# Altium PCB TMP75.PcbDoc
Units mil, origin at the board's own origin, x right, y up, seen from the top; angles counter-clockwise.
Board outline 910.03 x 405.03 mil, 2 copper layers (Top Layer, Bottom Layer); 8 components, 5 nets, 23 pads, 0 vias.
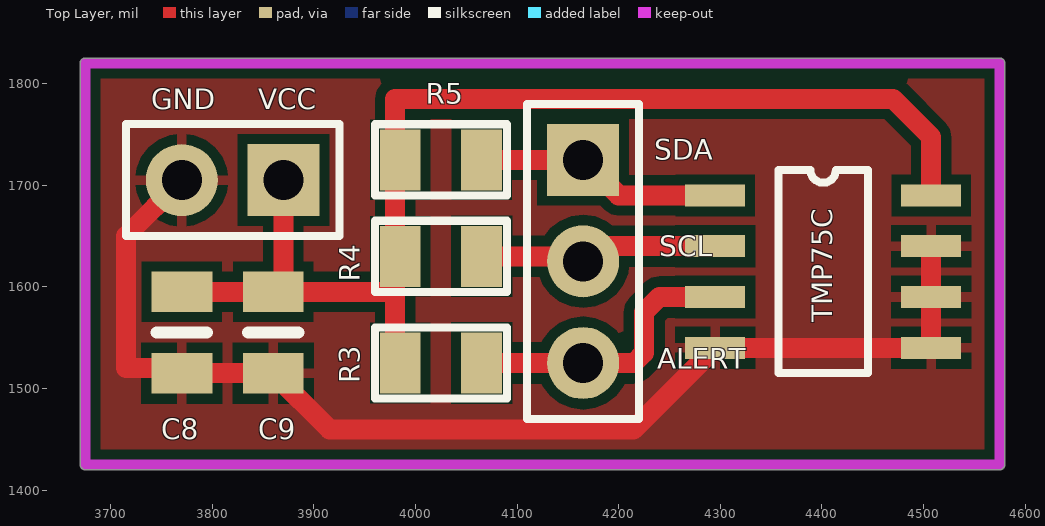
[diagram p0: Top Layer view]
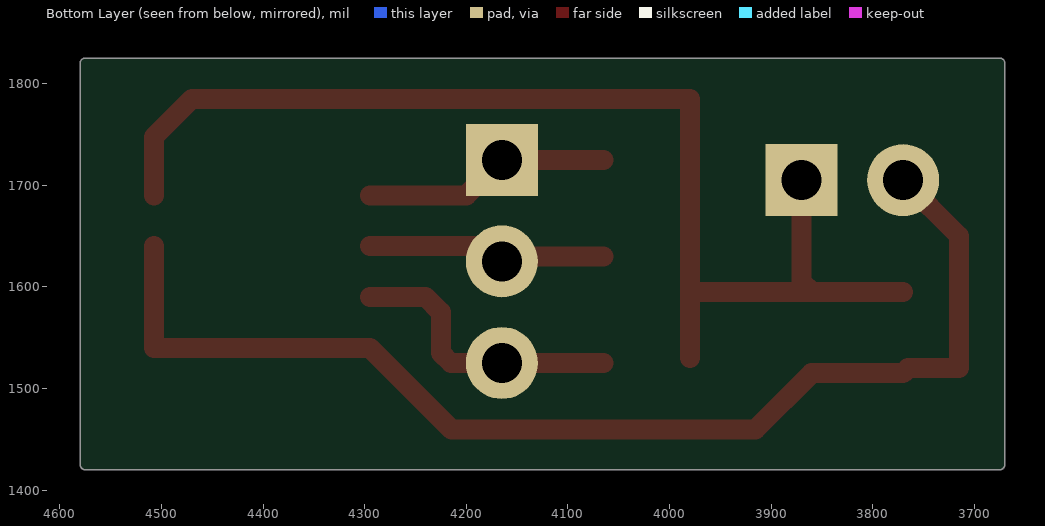
[diagram p1: Bottom Layer view, seen from below]
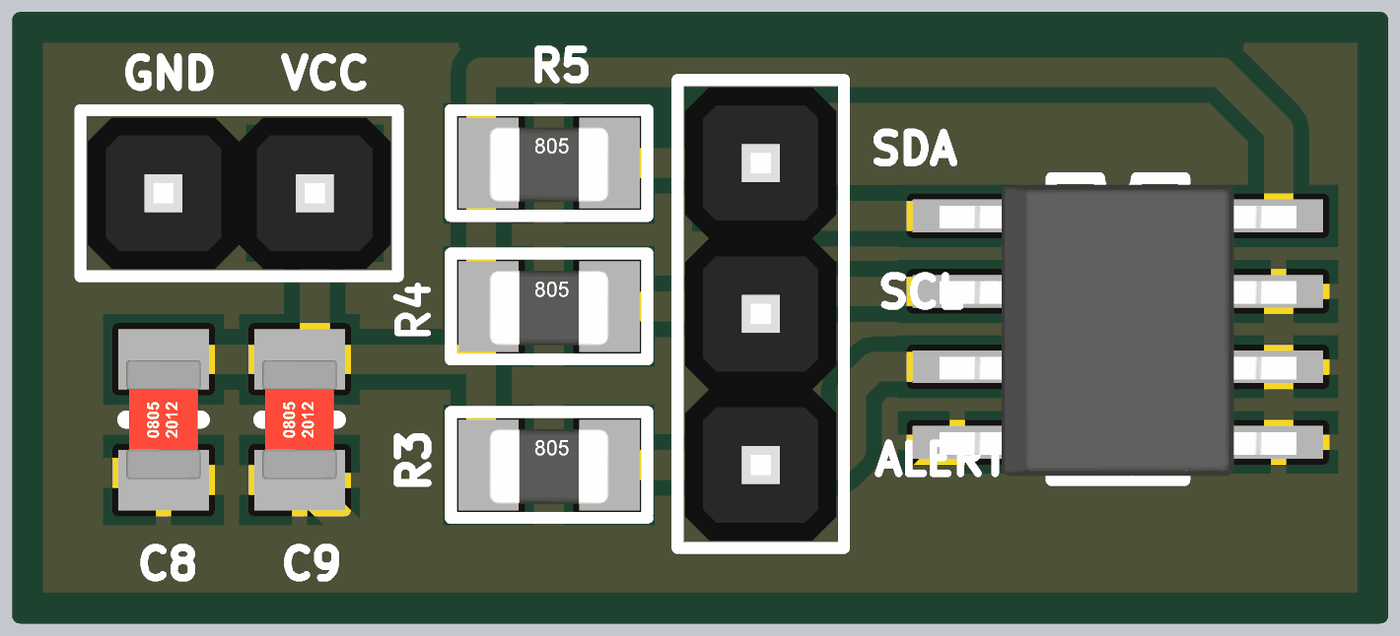
[diagram p2: 3D render of the assembled board from above, using the file's embedded part models]

## Layer stack, top to bottom
Top Solder: solder mask 0.4, Solder Resist, Dk 3.5
Top Layer: signal copper 1.4
Dielectric 1: dielectric 12.6, FR-4, Dk 4.8
Bottom Layer: signal copper 1.4
Bottom Solder: solder mask 0.4, Solder Resist, Dk 3.5

## Board outline
3669.99,1425 ccw(c3675,1425) 3675,1419.98 4575,1419.98 ccw(c4575,1425) 4580.02,1425 4580.02,1820 ccw(c4575,1820) 4575,1825.02 3675,1825.02 ccw(c3675,1820) 3669.99,1820

## Design rules (kind name [scope] priority, off if disabled: settings)
Clearance [All] p1: gap=10
PolygonConnect [All] p1: connectstyle=Relief reliefconductorwidth=10 reliefentries=4 polygonreliefangle="90 Angle" airgapwidth=10
RoutingVias [All] p1: holewidth=28 width=50 viastyle="Through Hole" minholewidth=28 minwidth=50 maxholewidth=28 maxwidth=50
SolderMaskExpansion [All] p1: expansion=4
Width [All] p1: maxlimit=19.68 minlimit=19.68 preferedwidth=19.68 minimp=50.000000 maximp=50.000000 favimp=50.000000
30 further rules are at their usual default settings.

## Classes and differential pairs
component class Sheet2: *

## Components (designator, comment, footprint, x,y, rotation, side; value= is the part's Value field where it differs from the comment)
C8 "10uF" SMD-0805C 3770,1555 r0 top
C9 "0.1uF" SMD-0805C 3860,1555 r0 top
CONN1 "Connector" "1x3x2.54 Pin Header TH V" 4165,1625 r270 top
CONN2 "Connector" "1x2x2.54 Pin Header TH V" 3820,1705 r180 top
R3 "10k" SMD-0805-RES 4025,1525 r270 top
R4 "10k" SMD-0805-RES 4025,1630 r270 top
R5 "10k" SMD-0805-RES 4025,1725 r270 top
TMP75C "Component_1" TMP75C 4295,1690 r0 top (schematic designator *)

## Footprints (in the part's own frame and the unit in brackets; to place one, negate y for a bottom-side part, rotate by r counter-clockwise, add the part's x,y. Pads: shape width x height; smd on the part's side, far side on the other; paste and mask are expansions set on the pad)
"1x2x2.54 Pin Header TH V" [mm] "1x2x2.54 Pin Header TH V"
  rect 1.8x1.8 hole 1: 1(-1.27,0)
  round 1.8 hole 1: 2(1.27,0)
  silkscreen extent -2.67,-1.4 2.67,1.4, body extent -2.54,-1.27 2.54,1.27, height 8.55
"1x3x2.54 Pin Header TH V" [mm] "1x3x2.54 Pin Header TH V"
  rect 1.8x1.8 hole 1: 1(-2.54,0)
  round 1.8 hole 1: 2(0,0) 3(2.54,0)
  silkscreen extent -3.94,-1.4 3.94,1.4, body extent -3.81,-1.27 3.81,1.27, height 8.55
SMD-0805-RES [mil]
  rect 60x40 smd: 1(0,40) 2(0,-40)
  silkscreen extent -35,-65 35,65, body extent -24,-39 26,39, height 31
SMD-0805C [mil]
  rect 60x40 smd: 1(0,40) 2(0,-40)
  silkscreen extent -25,0 25,0, body extent -25,-39 25,39, height 35
TMP75C [mm]
  rect 1.5x0.55 smd: 1(0,0) 2(0,-1.27) 3(0,-2.54) 4(0,-3.81) 5(5.4,-3.81) 6(5.4,-2.54) 7(5.4,-1.27) 8(5.4,0)
  silkscreen extent 1.58,-4.44 3.82,0.64, body extent -0.3,-4.38 5.7,0.53, height 1.63

## Part data
C8: library part CL21A106KAFN3NE, "Cap Ceramic 10uF 25V X5R 10% 0805"
C9: library part CL21B104JBCNNNC, "CAP CER 0.1uF 50V X7T 0805"
CONN1: library part "Header 1x3"
CONN2: library part "Header 1x2"
R3 R4 R5: library part ERJ-P6WJ103V, "RES SMD 10K OHM 5% 1/2W 0805"

## Nets (pads, with @x,y where several pads share a name; then routed paths per layer and width w, separated by ;. In a path a pad name is that pad's centre, name@x,y a point inside that pad or via, vN(x,y) a via of type N, cw(c..) or ccw(c..) an arc to the next point about the centre after c; other vN are vias at no path point)
3V: C8.1 C9.1 CONN2.1 R3.2 R4.2 R5.2 TMP75C.8 | length 1179.7
  Top Layer w19.68: C8.1 C9.1 ; CONN2.1 3870,1605 C9.1 ; R3.2@3980,1530 3980,1595 ; TMP75C.8 4507.6,1747.4 4470,1785 3980,1785 3980,1595 ; C9.1 3980,1595
ALERT: CONN1.3 R3.1 TMP75C.3 | length 280.4
  Top Layer w19.68: R3.1 CONN1.3 4215,1525 4225,1535 4225,1575 4240,1590 TMP75C.3
GND: C8.2 C9.2 CONN2.2 TMP75C.4 TMP75C.5 TMP75C.6 TMP75C.7 | length 1158.6
  Top Layer w19.68: CONN2.2 3715,1650 3715,1520 3765,1520 C8.2 C9.2 3915.28,1459.72 4214.72,1459.72 TMP75C.4 TMP75C.5 TMP75C.6 TMP75C.7
SCL: CONN1.2 R4.1 TMP75C.2 | length 231.2
  Top Layer w19.68: R4.1 CONN1.2@4160,1630 ; CONN1.2 4180,1640 TMP75C.2
SDA: CONN1.1 R5.1 TMP75C.1 | length 244.5
  Top Layer w19.68: R5.1 CONN1.1 4200,1690 TMP75C.1

## Polygon pours and split planes (outlines as drawn)
GND on Top Layer "Top Layer-No Net" (solid, pour order 2): 3675,1820 4575,1820 4575,1425 3675,1425 3675,1820

## Keep-outs
Top Layer:
  lines w10: 3675,1425 4575,1425 4575,1820 3675,1820 3675,1425

## Silkscreen, mask and mechanical layers (free items; w line width, h text height)
Top Overlay:
  text "GND" at 3740,1775 h20
  text "VCC" at 3845,1775 h20
  text "SDA" at 4235,1725 h20
  text "SCL" at 4240,1630 h20
  text "ALERT" at 4237.78,1519.17 h20